# Altium PCB UNOCompatibleBoard.PcbDoc
Units mil, origin at the board's own origin, x right, y up, seen from the top; angles counter-clockwise.
Board outline 2700 x 2100 mil, 2 copper layers (Top Layer, Bottom Layer); 11 components, 28 nets, 81 pads, 1 vias.
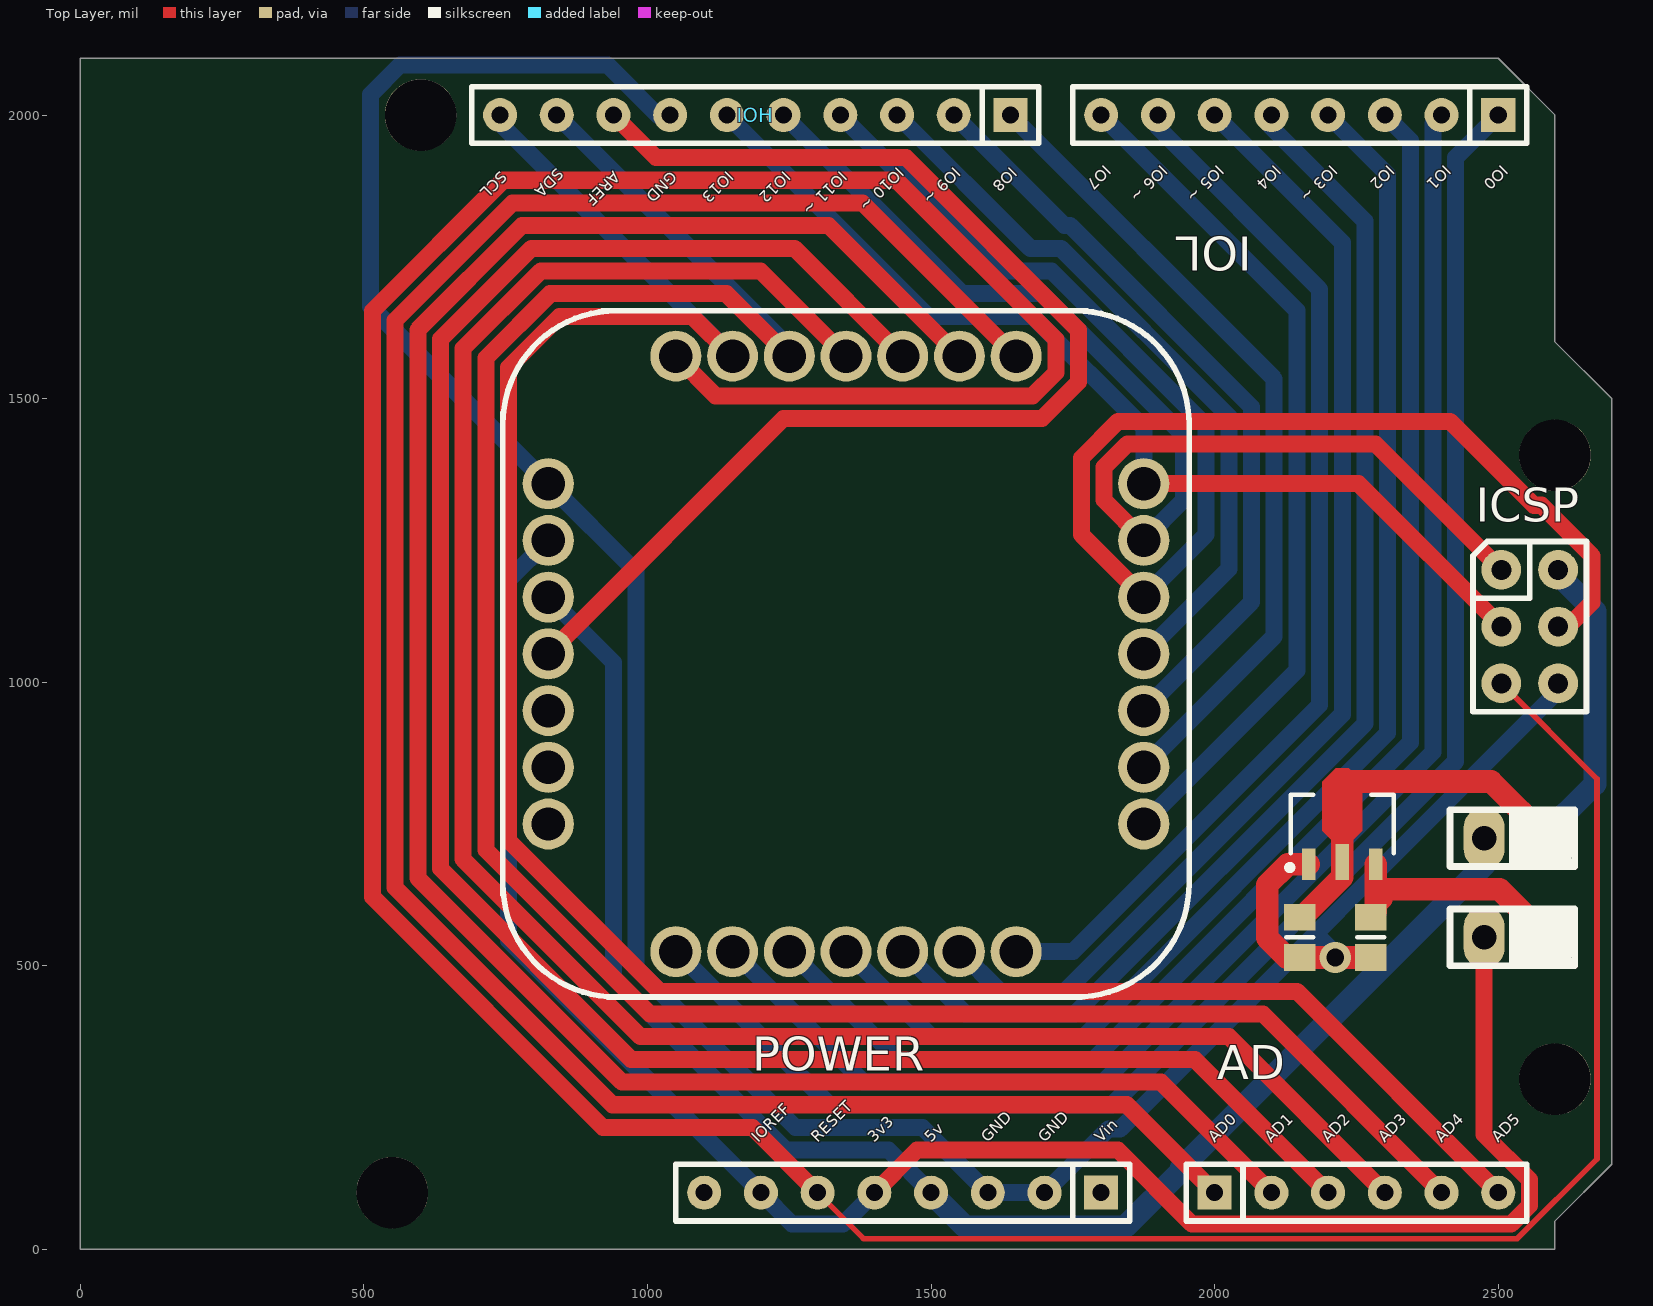
[diagram p0: Top Layer view]
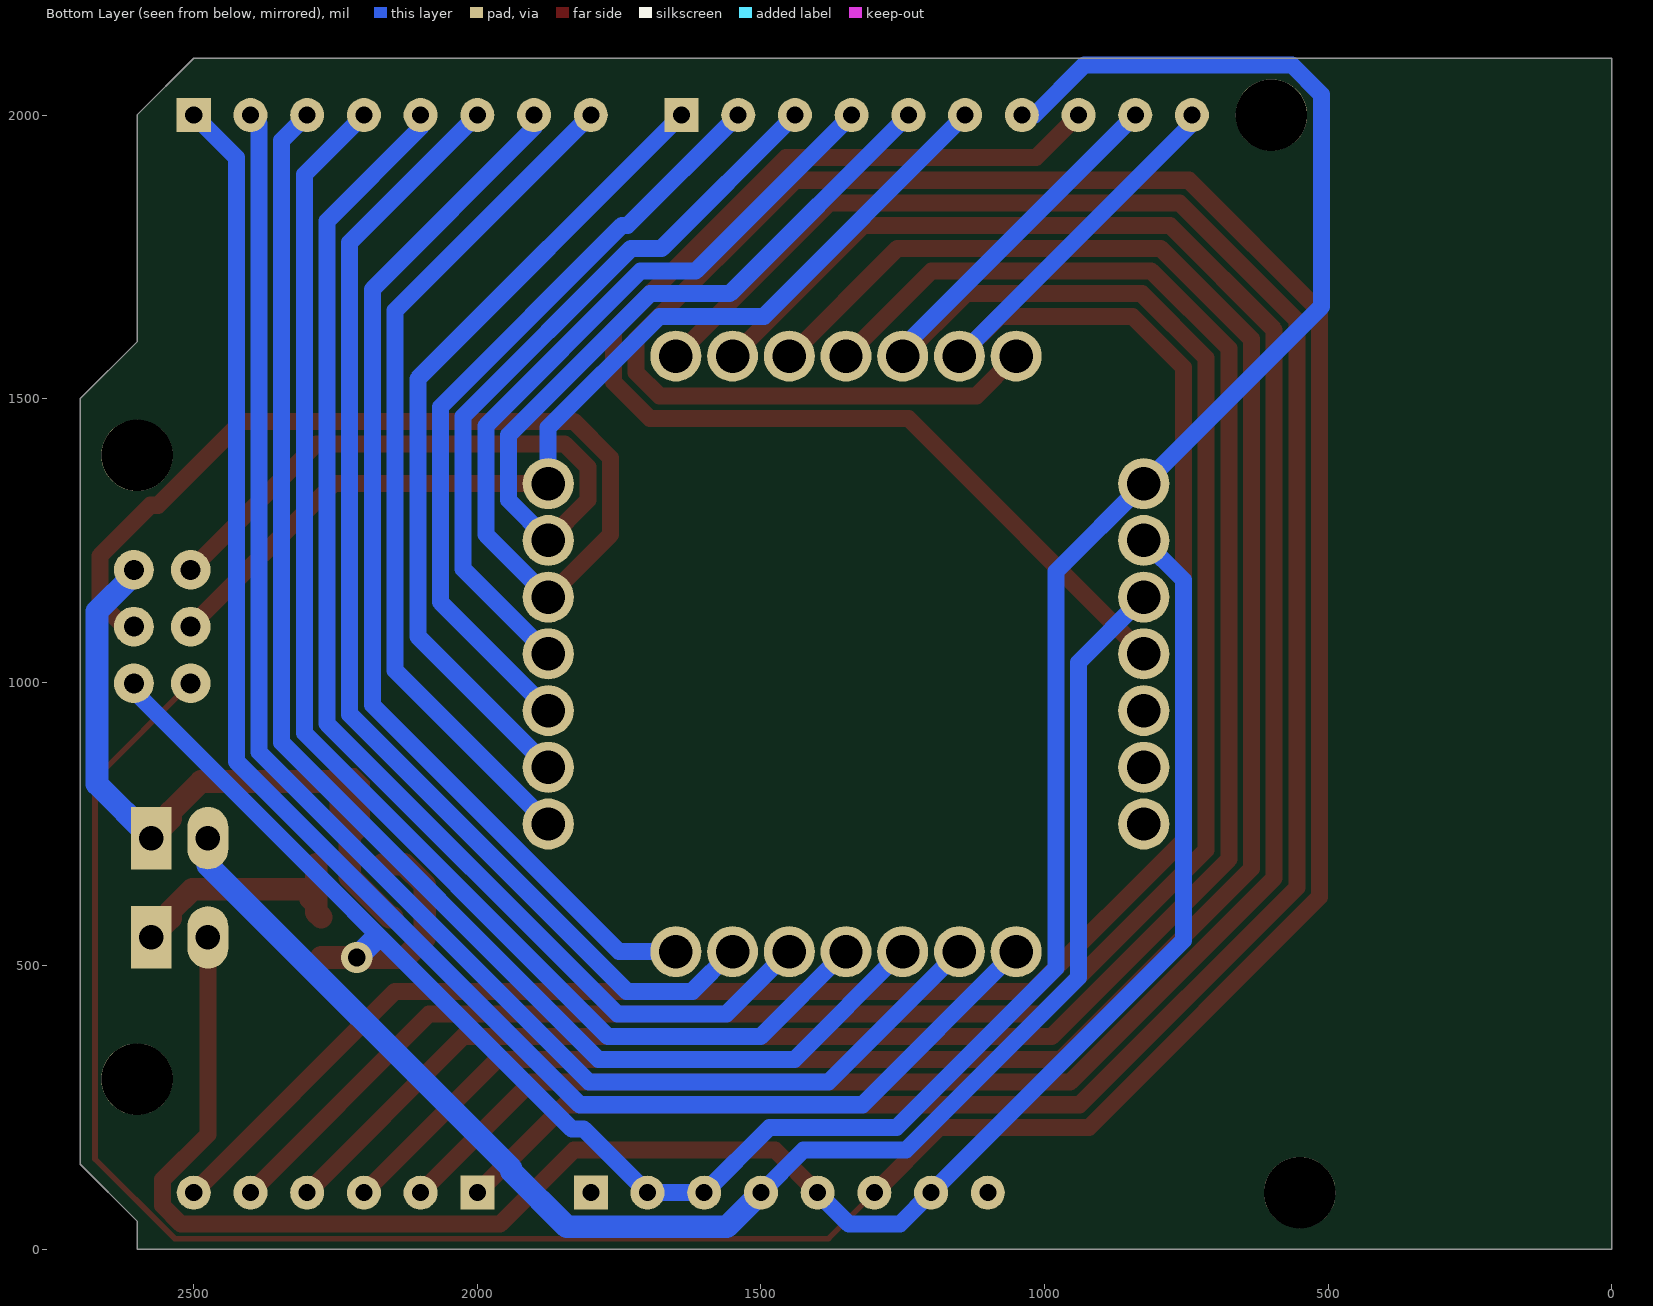
[diagram p1: Bottom Layer view, seen from below]

## Layer stack, top to bottom
Top Solder: solder mask 0.4, Solder Resist, Dk 3.5
Top Layer: signal copper 1.4
Dielectric1: dielectric 12.6, FR-4, Dk 4.8
Bottom Layer: signal copper 1.4
Bottom Solder: solder mask 0.4, Solder Resist, Dk 3.5

## Board outline
0,0 0,2100 2500,2100 2600,2000 2600,1600 2700,1500 2700,150 2600,50 2600,0

## Design rules (kind name [scope] priority, off if disabled: settings)
Clearance [All] p1: gap=6
PolygonConnect [All] p1: connectstyle=Relief reliefconductorwidth=10 reliefentries=4 polygonreliefangle="90 Angle" airgapwidth=10
RoutingVias [All] p1: holewidth=28 width=50 viastyle="Through Hole" minholewidth=28 minwidth=50 maxholewidth=28 maxwidth=50
SilkToSolderMaskClearance SilkscreenOverComponentPads [IsPad] p1: minsilkscreentomaskgap=10 clearancetoexposedcopper=TRUE
SolderMaskExpansion [All] p1: expansion=4
Width [All] p1: maxlimit=100 minlimit=10 preferedwidth=50
28 further rules are at their usual default settings.

## Components (designator, comment, footprint, x,y, rotation, side; value= is the part's Value field where it differs from the comment)
AD "AD" "Header 6x1 8.5mm" 2000,100 r0 top locked
C1 "10uf" 6-0805_N 2150,550 r270 top
C2 "10uf" 6-0805_N 2275,550 r270 top
ICSP "ICSP" ICSP 2505.51,1198.03 r0 top locked
IOH "IOH" "Header 10x1 8.5mm" 1640,2000 r180 top locked
IOL "IOL" "Header 8x1 8.5mm" 2500,2000 r180 top locked
J0 "MAGI-M8" MAGI-M8 1350,1050 r90 top
J1 "CON2" SIP2 2575,725 r180 top
J2 "CON2" sip2 2575,550 r180 top
POWER "POWER_UNO" "Header 8x1 8.5mm" 1800,100 r180 top locked
U1 "HS7333" HS7333 2225,750 r90 top

## Footprints (in the part's own frame and the unit in brackets; to place one, negate y for a bottom-side part, rotate by r counter-clockwise, add the part's x,y. Pads: shape width x height; smd on the part's side, far side on the other; paste and mask are expansions set on the pad)
6-0805_N [mm] "Chip Resistor, Body 2.0x1.2mm, IPC Medium Density"
  rect 1.2x1.4 smd: 1(-0.9,0) 2(0.9,0)
  silkscreen extent 0,-0.6 0,0.6, body extent -1.07,-0.7 1.07,0.7, height 0.7
"Header 6x1 8.5mm" [mil] "Stackable 6 pin header"
  rect 60x60 hole 30: 1(0,0)
  round 60 hole 30: 2(100,0) 3(200,0) 4(300,0) 5(400,0) 6(500,0)
  silkscreen extent -50,-50 550,50, body extent -50,-50 550,50, height 335
"Header 8x1 8.5mm" [mil] "Stackable 8 pin header"
  rect 60x60 hole 30: 1(0,0)
  round 60 hole 30: 2(100,0) 3(200,0) 4(300,0) 5(400,0) 6(500,0) 7(600,0) 8(700,0)
  silkscreen extent -50,-50 750,50, body extent -50,-50 750,50, height 335
"Header 10x1 8.5mm" [mil] "Stackable 10 pin header"
  rect 60x60 hole 30: 1(0,0)
  round 60 hole 30: 2(100,0) 3(200,0) 4(300,0) 5(400,0) 6(500,0) 7(600,0) 8(700,0) 9(800,0) 10(900,0)
  silkscreen extent -50,-50 950,50, body extent -50,-50 950,50, height 335
HS7333 [mm] "SOT89, 3-Leads, Body 4.50x2.50mm, Pitch 1.50mm, Lead Span 4.1mm, IPC Medium Density"
  rect 1.4x0.6 smd: 1(-1.8,1.5) 3(-1.8,-1.5)
  rect 1.6x0.6 smd: 2(-1.7,0)
  Top Layer region: -0.9,0.3 -0.3,0.9 1.9,0.9 2.5,0.3 2.5,-0.3 1.9,-0.9 -0.3,-0.9 -0.9,-0.3
  silkscreen extent -2.07,-2.3 1.3,2.47, body extent -1.3,-2.3 1.3,2.3, height 1.6
ICSP [mil]
  round 70 hole 35.43: 1(0,0) 2(100,0) 3(0,-100) 4(100,-100) 5(0,-200) 6(100,-200)
  silkscreen extent -50,-250 150,50, body extent -50,-250 150,50, height 485
MAGI-M8 [mil]
  round 90 hole 59.06: 1(300,525) 2(200,525) 3(100,525) 4(0,525) 5(-100,525) 6(-200,525) 7(-300,525) 8(-525,300) 9(-525,200) 10(-525,100) 11(-525,0) 12(-525,-100) 13(-525,-200) 14(-525,-300) 15(-300,-525) 16(-200,-525) 17(-100,-525) 18(0,-525) 19(100,-525) 20(200,-525) 21(300,-525) 22(525,-300) 23(525,-200) 24(525,-100) 25(525,0) 26(525,100) 27(525,200) 28(525,300)
  silkscreen extent -605,-605 605,605
SIP2 [mil]
  rect 72x110 hole 43.31: 1(0,0)
  oval 72x110 hole 43.31: 2(100,0)
  silkscreen extent -60,-50 160,50
sip2 [mil]
  rect 72x110 hole 43.31: 1(0,0)
  oval 72x110 hole 43.31: 2(100,0)
  silkscreen extent -60,-50 160,50

## Part data
C1 C2: library part "CAPACITOR POL", "Capacitor"
J1 J2: "Connector"

## Free pads (board coordinates)
  round 125.98 hole 125.98: 0(550,100) 0(600,2000) 0(2600,300) 0(2600,1400)

## Via types
v1: diameter 55.12, hole 31.5, Top Layer to Bottom Layer, 1 vias

## Nets (pads, with @x,y where several pads share a name; then routed paths per layer and width w, separated by ;. In a path a pad name is that pad's centre, name@x,y a point inside that pad or via, vN(x,y) a via of type N, cw(c..) or ccw(c..) an arc to the next point about the centre after c; other vN are vias at no path point)
3.3V_: C2.1 J2.1 U1.3 | length 450.9
  Top Layer w40: C2.1 2284.06,594.49 C2.1@2284.06,609.05 ; U1.3 C2.1@2284.06,609.05 ; J2.1 2541,584 2541,596.34 2502.34,635 2294.06,635 2294.06,619.05 C2.1@2284.06,609.05
3V3: J0.2 J2.2 POWER.5 POWER.7 | length 3368.1
  Top Layer w30: POWER.5 1475,175 1829.64,175 1959.64,45 2522.78,45 2555,77.22 2555,122.78 2475,202.78 J2.2
  Bottom Layer w30: J0.2 755,1180 755,545 POWER.7 1255,45 1345,45 POWER.5
5V: J0.3 J1.2 POWER.4 | length 2749.7
  Bottom Layer w30: J0.3 940,1035 940,479.44 1244.44,175 1425,175 POWER.4
  Bottom Layer w40: POWER.4 1560,40 1842.43,40 1940,137.57 1940,142.43 2475,677.43 J1.2
5V_: C1.1 ICSP.2 J1.1 U1.2 | length 1211.2
  Top Layer w40: C1.1 2154.04,585.43 2225,656.39 U1.2 2225,825 2487.34,825 2541,771.34 2541,759 J1.1
  Bottom Layer w40: J1.1 2670.51,820.51 2670.51,1124.95 2605.51,1189.95 ICSP.2
AD0: AD.1 J0.22 | length 3960.2
  Top Layer w30: J0.22 1648.99,1575 1378.99,1845 762.16,1845 555,1637.84 555,638.16 938.16,255 1845,255 AD.1
AD1: AD.2 J0.23 | length 3827.7
  Top Layer w30: J0.23 1548.99,1575 1318.99,1805 778.73,1805 595,1621.27 595,654.73 954.73,295 1905,295 AD.2
AD2: AD.3 J0.24 | length 3695.1
  Top Layer w30: J0.24 1448.99,1575 1258.99,1765 795.29,1765 635,1604.71 635,671.3 971.3,335 1965,335 AD.3
AD3: AD.4 J0.25 | length 3562.6
  Top Layer w30: J0.25 1348.99,1575 1198.99,1725 811.86,1725 675,1588.14 675,687.87 987.87,375 2025,375 AD.4
AD4: AD.5 IOH.9 J0.26 | length 4024.9
  Top Layer w30: J0.26 1248.99,1575 1138.99,1685 828.43,1685 715,1571.57 715,704.44 1004.44,415 2085,415 AD.5
  Bottom Layer w30: IOH.9 1250,1590 J0.26
AD5: AD.6 IOH.10 J0.27 | length 3892.3
  Top Layer w30: J0.27 1148.99,1575 1078.99,1645 845,1645 755,1555 755,721.01 1021.01,455 2145,455 AD.6
  Bottom Layer w30: IOH.10 740,1985 J0.27
AREF: IOH.8 J0.4 | length 2201.9
  Top Layer w30: J0.4 1240,1465 1695.56,1465 1760,1529.44 1760,1620.56 1455.56,1925 1015,1925 IOH.8
GND: C1.2 C2.2 ICSP.6 IOH.7 J0.1 POWER.2 POWER.3 U1.1 | length 4918.8
  Top Layer w40: U1.1 2129.13,679.13 2092.44,642.44 2092.44,549.38 2127.26,514.57 C1.2 v1(2212.5,514.57) C2.2
  Bottom Layer w30: IOH.7 1017.78,2000 929.79,2087.99 563.55,2087.99 512.01,2036.45 512.01,1662.01 824.02,1350 J0.1 980,1195 980,496.01 1261.01,215 1485,215 POWER.3 POWER.2 1812.5,212.5 1833.48,212.5 2605.51,984.53 ICSP.6
  Bottom Layer w40: 2176.53,548.47 2178.59,548.47 v1(2212.5,514.57)
IO0: IOL.1 J0.8 | length 2908.2
  Bottom Layer w30: J0.8 1051.01,525 1321.01,255 1819.41,255 2425,860.59 2425,1925 IOL.1
IO1: IOL.2 J0.9 | length 2700.5
  Bottom Layer w30: J0.9 1151.01,525 1381.01,295 1802.84,295 2385,877.16 2385,1985 IOL.2
IO2: IOL.3 J0.10 | length 2530
  Bottom Layer w30: J0.10 1251.01,525 1441.01,335 1786.27,335 2345,893.73 2345,1955 IOL.3
IO3: IOL.4 J0.11 | length 2372.1
  Bottom Layer w30: J0.11 1351.01,525 1501.01,375 1769.71,375 2305,910.29 2305,1895 IOL.4
IO4: IOL.5 J0.12 | length 2214.1
  Bottom Layer w30: J0.12 1451.01,525 1561.01,415 1753.14,415 2265,926.86 2265,1812.78 2100,1977.78 IOL.5
IO5: IOL.6 J0.13 | length 2056.1
  Bottom Layer w30: J0.13 1551.01,525 1621.01,455 1736.57,455 2225,943.43 2225,1775 IOL.6
IO6: IOL.7 J0.14 | length 1873.2
  Bottom Layer w30: J0.14 1750,525 2185,960 2185,1692.78 1900,1977.78 IOL.7
IO7: IOL.8 J0.15 | length 1504.7
  Bottom Layer w30: IOL.8 2145,1655 2145,1021.01 1875,751.01 J0.15
IO8: IOH.1 J0.16 | length 1437.9
  Bottom Layer w30: IOH.1 2105,1535 2105,1081.01 1875,851.01 J0.16
IO9: IOH.2 J0.17 | length 1352.2
  Bottom Layer w30: IOH.2 1735,1805 1745.27,1805 2065,1485.27 2065,1141.01 1875,951.01 J0.17
IO10: IOH.3 J0.18 | length 1285.9
  Bottom Layer w30: IOH.3 1675,1765 1728.7,1765 2025,1468.7 2025,1200 J0.18
IO11: ICSP.4 IOH.4 J0.19 | length 2696.1
  Top Layer w30: J0.19 1765,1260 1765,1395.56 1829.44,1460 2415,1460 2562.99,1312.01 2576.39,1312.01 2665.51,1222.88 2665.51,1140.51 2623.03,1098.03 ICSP.4
  Bottom Layer w30: IOH.4 1615,1725 1712.13,1725 1985,1452.13 1985,1260 J0.19
IO12: ICSP.1 IOH.5 J0.20 | length 2120.8
  Top Layer w30: J0.20 1875,1251.01 1805,1321.01 1805,1378.99 1846.01,1420 2283.54,1420 ICSP.1
  Bottom Layer w30: IOH.5 1555,1685 1695.56,1685 1945,1435.56 1945,1321.01 1875,1251.01 J0.20
IO13: ICSP.3 IOH.6 J0.21 | length 1797.1
  Top Layer w30: J0.21 2253.54,1350 ICSP.3
  Bottom Layer w30: IOH.6 1495,1645 1678.99,1645 1875,1448.99 J0.21
RESET: ICSP.5 J0.28 POWER.6 | length 6598.8
  Top Layer w10: POWER.6 1381,19 2533.55,19 2673.99,159.44 2673.99,829.55 ICSP.5
  Top Layer w30: J0.28 1120,1505 1678.99,1505 1720,1546.01 1720,1603.99 1438.99,1885 745.59,1885 515,1654.41 515,621.59 921.59,215 1185,215 POWER.6
VIN: POWER.1
pads on no net: J0.5 J0.6 J0.7 POWER.8

## Silkscreen, mask and mechanical layers (free items; w line width, h text height)
Top Overlay:
  text "IO7" at 1805,1912.93 h20 r225
  text "IO6 ~" at 1905,1912.93 h20 r225
  text "IO5 ~" at 2005,1912.93 h20 r225
  text "IO4" at 2105,1912.93 h20 r225
  text "IO3 ~" at 2205,1912.93 h20 r225
  text "IO2" at 2305,1912.93 h20 r225
  text "IO1" at 2405,1912.93 h20 r225
  text "IO0" at 2505,1912.93 h20 r225
  text "IO10 ~" at 1440,1910 h20 r225
  text "IO9 ~" at 1540,1910 h20 r225
  text "IO8" at 1640,1910 h20 r225
  text "SDA" at 840,1907.93 h20 r225
  text "SCL" at 740,1902.93 h20 r225
  text "AREF" at 940,1902.93 h20 r225
  text "GND" at 1040,1902.93 h20 r225
  text "IO13" at 1140,1902.93 h20 r225
  text "IO12" at 1240,1902.93 h20 r225
  text "IO11 ~" at 1340,1902.93 h20 r225
  text "IOREF" at 1195,187.07 h20 r45
  text "RESET" at 1300,187.07 h20 r45
  text "3v3" at 1400,187.07 h20 r45
  text "5v" at 1500,187.07 h20 r45
  text "GND" at 1600,187.07 h20 r45
  text "GND" at 1700,187.07 h20 r45
  text "Vin" at 1800,187.07 h20 r45
  text "AD0" at 2000,187.07 h20 r45
  text "AD1" at 2100,187.07 h20 r45
  text "AD2" at 2200,187.07 h20 r45
  text "AD3" at 2300,187.07 h20 r45
  text "AD4" at 2400,187.07 h20 r45
  text "AD5" at 2500,187.07 h20 r45
  text "RESET" at 1295,-2515 h20 r45
  text "3v3" at 1395,-2515 h20 r45
  text "5v" at 1495,-2515 h20 r45
  text "GND" at 1595,-2515 h20 r45
  text "GND" at 1695,-2515 h20 r45
  text "Vin" at 1795,-2515 h20 r45
Mechanical 1:
  circle w5: c600,2000 r62.99
  circle w5: c2600,300 r62.99
  circle w5: c550,100 r62.99
  circle w5: c2600,1400 r62.99
  lines w5: 0,0 0,2100 2500,2100 2600,2000 2600,1600 2700,1500 2700,150 2600,50 2600,0 0,0